# EAGLE board KeyJam Lite (EAGLE 9.6.2)
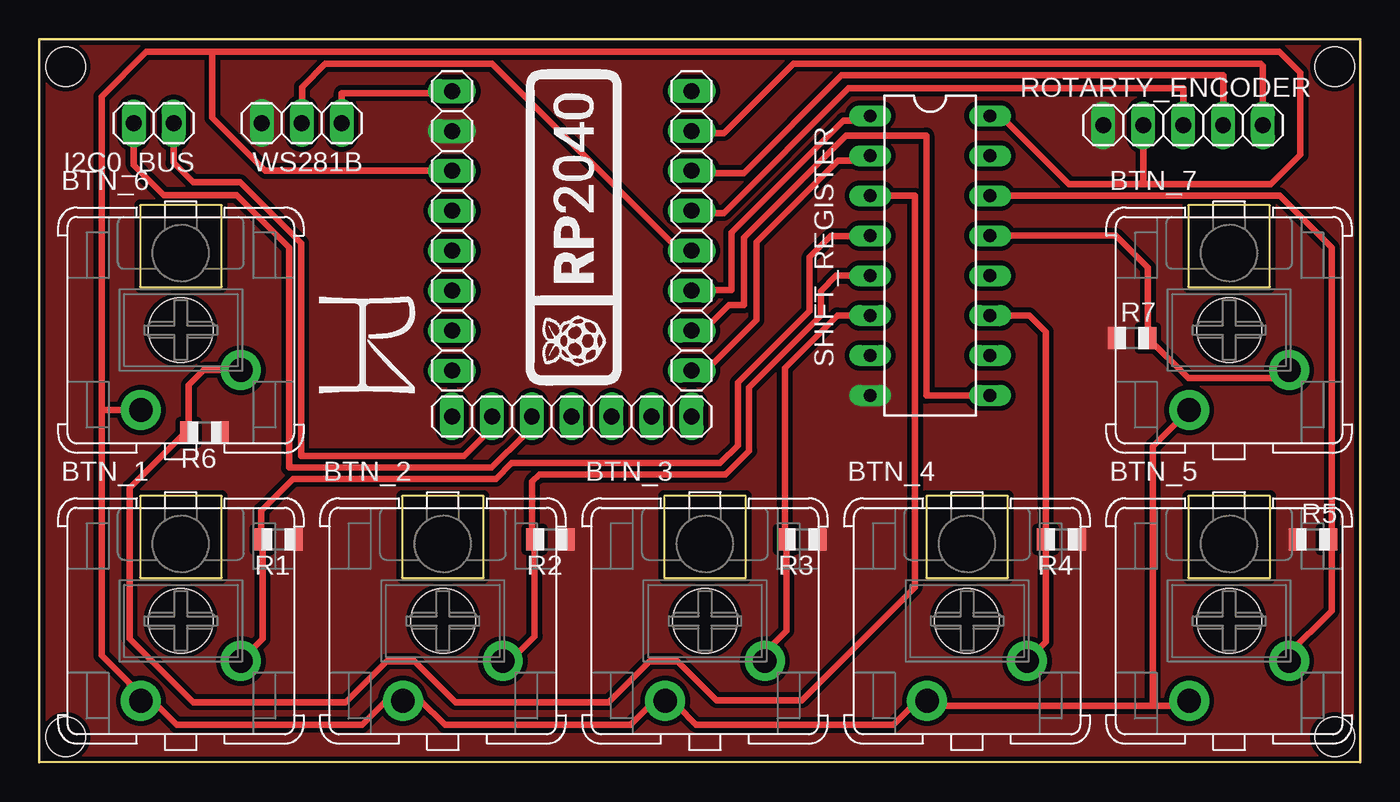
[diagram p0: board, top side]

Size 84 x 46 mm. Coordinates in mm from the lower left corner, seen from the top.
Outline: 84,45 84,44.93
Outline: 23.07,16.95 23.07,11.75 28.27,11.75 28.27,16.95 23.07,16.95
Outline: 39.73,16.95 39.73,11.75 44.93,11.75 44.93,16.95 39.73,16.95
Outline: 56.4,16.95 56.4,11.75 61.6,11.75 61.6,16.95 56.4,16.95
Outline: 73.07,16.95 73.07,11.75 78.27,11.75 78.27,16.95 73.07,16.95
Outline: 84,0 0,0 0,46 84,46 84,0
Outline: 6.4,11.75 11.6,11.75 11.6,16.95 6.4,16.95 6.4,11.75
Outline: 6.4,35.45 6.4,30.25 11.6,30.25 11.6,35.45 6.4,35.45
Outline: 73.07,35.45 73.07,30.25 78.27,30.25 78.27,35.45 73.07,35.45
Copper layers (1*16): Top 0.035mm / dielectric 1.5mm / Bottom 0.035mm
Design rules "DRC_Advanced *": minimum track width 16mil, minimum drill 0.3mm, track to track 12mil, track to pad 12mil, pad to pad 12mil, via to via 12mil, smd to smd 6mil, copper to edge 12mil, drill to drill 12mil, minimum pad ring 10mil, minimum via ring 8mil, stop-mask expansion 4mil, vias tented up to drill 0mil, thermal gap 20mil
Holes 2.5 mm at 1.69,44.25 82.38,44.25 82.38,1.62 1.69,1.62

## Footprints (pad centres in the part's own frame; a part is rotated, then mirrored left to right if it is on the bottom)
1X07 = drill 1.016 long: 1 -7.62,0; 2 -5.08,0; 3 -2.54,0; 4 0,0; 5 2.54,0; 6 5.08,0; 7 7.62,0
1X08 = drill 1.016 long: 1 -8.89,0; 2 -6.35,0; 3 -3.81,0; 4 -1.27,0; 5 1.27,0; 6 3.81,0; 7 6.35,0; 8 8.89,0
MX_SWITCH = drill 1.5 pad 2.54: S1 -3.81,2.54; S2 2.54,5.08 | hole 4.1: 0,0
1X02 = drill 1.016 long: 1 -1.27,0; 2 1.27,0
ADAFRUIT_R0805 = smd 1.1 x 1.4: 1 -1,0; 2 1,0
1X05 = drill 1.016 long: 1 -5.08,0; 2 -2.54,0; 3 0,0; 4 2.54,0; 5 5.08,0
DIL16 = drill 0.813 long: 1 -8.89,-3.81; 2 -6.35,-3.81; 3 -3.81,-3.81; 4 -1.27,-3.81; 5 1.27,-3.81; 6 3.81,-3.81; 7 6.35,-3.81; 8 8.89,-3.81; 9 8.89,3.81; 10 6.35,3.81; 11 3.81,3.81; 12 1.27,3.81; 13 -1.27,3.81; 14 -3.81,3.81; 15 -6.35,3.81; 16 -8.89,3.81
1X03 = drill 1.016 long: 1 -2.54,0; 2 0,0; 3 2.54,0

## Placement (x,y rotation side)
2040_BOTTOM  [1X07]  33.86,22.01 0 top
2040_LEFT  [1X08]  26.24,33.82 270 top
2040_RIGHT  [1X08]  41.48,33.82 90 top
BTN_1  MX_SWITCH  [MX_SWITCH]  9,9 180 top
BTN_2  MX_SWITCH  [MX_SWITCH]  25.67,9 180 top
BTN_3  MX_SWITCH  [MX_SWITCH]  42.33,9 180 top
BTN_4  MX_SWITCH  [MX_SWITCH]  59,9 180 top
BTN_5  MX_SWITCH  [MX_SWITCH]  75.67,9 180 top
BTN_6  MX_SWITCH  [MX_SWITCH]  9,27.5 180 top
BTN_7  MX_SWITCH  [MX_SWITCH]  75.67,27.5 180 top
I2C0_BUS  [1X02]  7.27,40.65 180 top
R1  [ADAFRUIT_R0805]  15.2,14.2 180 top
R2  [ADAFRUIT_R0805]  32.5,14.2 180 top
R3  [ADAFRUIT_R0805]  48.5,14.2 180 top
R4  [ADAFRUIT_R0805]  65,14.2 180 top
R5  [ADAFRUIT_R0805]  81,14.2 0 top
R6  [ADAFRUIT_R0805]  10.5,21 180 top
R7  [ADAFRUIT_R0805]  69.5,27 0 top
ROTARTY_ENCODER  [1X05]  72.74,40.53 0 top
SHIFT_REGISTER  74LS165N  [DIL16]  56.65,32.24 270 top
U$1  [RASPI_RP2040_LOGO_20MM]  34,34 90 top
WS281B  [1X03]  16.69,40.67 180 top

## Library data of the parts
2040_BOTTOM 2040_LEFT 2040_RIGHT I2C0_BUS ROTARTY_ENCODER WS281B = pinhead
BTN_1-BTN_7 = MX_Switch; FARNELL: 2292961; MOUSER: 540-MX1A-11NW
R1-R7 = Ocreeb 12
SHIFT_REGISTER = 74xx-us
U$1 = SparkFun-Aesthetics

## Nets
3.3V: 2040_LEFT.3 BTN_1.S2 BTN_2.S2 BTN_3.S2 BTN_4.S2 BTN_5.S2 BTN_6.S2 BTN_7.S2 ROTARTY_ENCODER.2 SHIFT_REGISTER.16
5V: 2040_LEFT.1 WS281B.1
BTN_1: BTN_1.S1 R1.2 SHIFT_REGISTER.4
BTN_2: BTN_2.S1 R2.2 SHIFT_REGISTER.5
BTN_3: BTN_3.S1 R3.2 SHIFT_REGISTER.6
BTN_4: BTN_4.S1 R4.2 SHIFT_REGISTER.11
BTN_5: BTN_5.S1 R5.2 SHIFT_REGISTER.14
BTN_6: BTN_6.S1 R6.2 SHIFT_REGISTER.3
BTN_7: BTN_7.S1 R7.2 SHIFT_REGISTER.13
CLK: 2040_RIGHT.1 SHIFT_REGISTER.2
GND: 2040_LEFT.2 R1.1 R2.1 R3.1 R4.1 R5.1 R6.1 R7.1 ROTARTY_ENCODER.1 SHIFT_REGISTER.8 WS281B.3
GP0: 2040_RIGHT.8
GP1: 2040_RIGHT.7 ROTARTY_ENCODER.5
GP2: 2040_RIGHT.6 ROTARTY_ENCODER.4
GP3: 2040_RIGHT.5 ROTARTY_ENCODER.3
GP4: 2040_RIGHT.4 WS281B.2
GP8: 2040_BOTTOM.7
GP9: 2040_BOTTOM.6
GP10/I2C1_SDA: 2040_BOTTOM.5
GP11/I2C1_SCL: 2040_BOTTOM.4
GP12/I2C0_SDA: 2040_BOTTOM.3 I2C0_BUS.2
GP13/12C0_SCL: 2040_BOTTOM.2 I2C0_BUS.1
GP14: 2040_BOTTOM.1
GP15: 2040_LEFT.8
GP26: 2040_LEFT.7
GP27: 2040_LEFT.6
GP28: 2040_LEFT.5
GP29: 2040_LEFT.4
LATCH: 2040_RIGHT.3 SHIFT_REGISTER.1
SR_DATA: 2040_RIGHT.2 SHIFT_REGISTER.9

## Tracks (layer width: path | path; a pad name or v marks a point on that pad's centre or on a via)
3.3V
  Top 0.406: SHIFT_REGISTER.16 60.5,41.12 61.5,41.12 61.5,40.75 65.47,36.78 70,36.78 | 70.81,3.6 56.59,3.6 BTN_4.S2 56.23,3.6 55.52,3.6 54.33,2.41 41.77,2.41 40.58,3.6 39.87,3.6 BTN_3.S2 39.52,3.6 38.81,3.6 37.59,2.39 25.79,2.39 24.23,3.96 23.16,3.96 BTN_2.S2 22.8,3.96 22.09,3.96 20.53,2.39 8.72,2.39 7.51,3.6 6.8,3.6 BTN_1.S2 6.45,3.96 5.73,4.67 5.73,5.02 3.96,6.8 3.96,22.5 | 70.81,3.6 72.94,3.6 BTN_5.S2 | 11,45.21 78.86,45.21 80.2,43.86 80.2,38.66 78.32,36.78 70,36.78 | 70.81,3.6 70.81,20.1 BTN_7.S2 | 11,45.21 6.8,45.21 3.96,42.36 3.96,22.5 | 11,45.21 11,41.01 14.38,37.63 2040_LEFT.3 | BTN_6.S2 4.04,22.42 3.96,22.5 | ROTARTY_ENCODER.2 70.2,36.98 70,36.78
5V
  Top 0.406: WS281B.1 19.23,42.58 26.23,42.58 2040_LEFT.1
BTN_1
  Top 0.406: SHIFT_REGISTER.4 52.67,33.47 50.32,33.47 48.98,32.14 48.98,28.72 44.43,24.16 44.43,20.17 43.3,19.04 30.04,19.04 29.05,18.04 16.14,18.04 14.11,16.01 14.11,14.29 R1.2 14.2,7.85 BTN_1.S1
BTN_2
  Top 0.406: 51.96,30.63 52.67,30.63 SHIFT_REGISTER.5 50.67,30.97 49.7,30 49.7,28.42 45.14,23.86 45.14,19.81 43.65,18.32 31.8,18.32 31.34,17.86 31.34,14.36 R2.2 31.5,8.03 30.27,6.8 29.56,6.8 BTN_2.S1
BTN_3
  Top 0.406: BTN_3.S1 45.92,6.8 47.5,8.38 R3.2 47.41,14.29 47.41,25.09 50.76,28.43 SHIFT_REGISTER.6
BTN_4
  Top 0.406: BTN_4.S1 62.8,6.47 64,7.67 R4.2 64,27.39 62.96,28.43 SHIFT_REGISTER.11
BTN_5
  Top 0.406: BTN_5.S1 79.34,6.8 82.19,9.65 82.19,14.39 | 82.19,14.39 82.19,32.76 78.88,36.07 78.87,36.05 SHIFT_REGISTER.14 | 82.19,14.39 R5.2
BTN_6
  Top 0.406: 12.49,24.23 12.49,24.94 BTN_6.S1 10.46,24.96 9.5,24 R6.2 9.27,21 5.73,17.47 5.73,7.87 9.77,3.83 19.48,3.83 22.09,6.45 23.87,6.45 26.48,3.83 36.19,3.83 38.81,6.45 40.58,6.45 43.07,3.96 48.48,3.96 55.67,11.14 55.67,36.05 SHIFT_REGISTER.3
BTN_7
  Top 0.406: SHIFT_REGISTER.13 68.46,33.51 70.5,31.47 R7.2 73.06,24.44 78.96,24.44 BTN_7.S1
CLK
  Top 0.406: SHIFT_REGISTER.2 52.74,38.45 52.58,38.29 50.78,38.29 45.59,33.1 45.59,28.13 42.42,24.96 41.62,24.96 2040_RIGHT.1
GND
  pour Top (no thermals): 0.03,46 84,46 84,0 0.03,0
GP1
  Top 0.406: 2040_RIGHT.7 41.62,40.04 43.53,40.04 47.95,44.46 77.67,44.46 77.82,44.31 ROTARTY_ENCODER.5
GP2
  Top 0.406: 2040_RIGHT.6 41.62,37.5 44.8,37.5 51.01,43.71 75.28,43.71 ROTARTY_ENCODER.4
GP3
  Top 0.406: 73.06,40.99 72.74,40.67 ROTARTY_ENCODER.3 72.74,42.9 51.47,42.9 43.53,34.96 41.62,34.96 2040_RIGHT.5
GP4
  Top 0.406: 2040_RIGHT.4 41.47,32.58 40.99,33.05 40.2,33.05 28.8,44.45 18.18,44.45 16.7,42.97 16.7,40.67 WS281B.2
GP12/I2C0_SDA
  Top 0.406: 2040_BOTTOM.3 31.25,22 30.88,21.62 30.88,20.88 28.75,18.75 15.88,18.75 15.88,32.74 12.54,36.08 7.92,36.08 6,38 I2C0_BUS.2
GP13/12C0_SCL
  Top 0.406: 2040_BOTTOM.2 28.75,22 28.25,21.5 28.25,20.75 27,19.5 16.65,19.5 16.65,33.05 12.78,36.91 9.77,36.91 8.54,38.14 I2C0_BUS.1
LATCH
  Top 0.406: SHIFT_REGISTER.1 52.74,40.99 52.58,40.83 51.13,40.83 44.01,33.71 44.01,30.04 41.62,30.04 2040_RIGHT.3
SR_DATA
  Top 0.406: SHIFT_REGISTER.9 56.4,23.34 56.4,39.88 51.28,39.88 44.8,33.39 44.8,29.08 43.85,29.08 42.26,27.5 41.62,27.5 2040_RIGHT.2